# Altium PCB PCB1.PcbDoc (part 1 of 2)
Units mm, origin at the board's own origin, x right, y up, seen from the top; angles counter-clockwise.
Board outline 300 x 52 mm, 2 copper layers (Top Layer, Bottom Layer); 9 components, 43 nets, 99 pads, 36 vias.
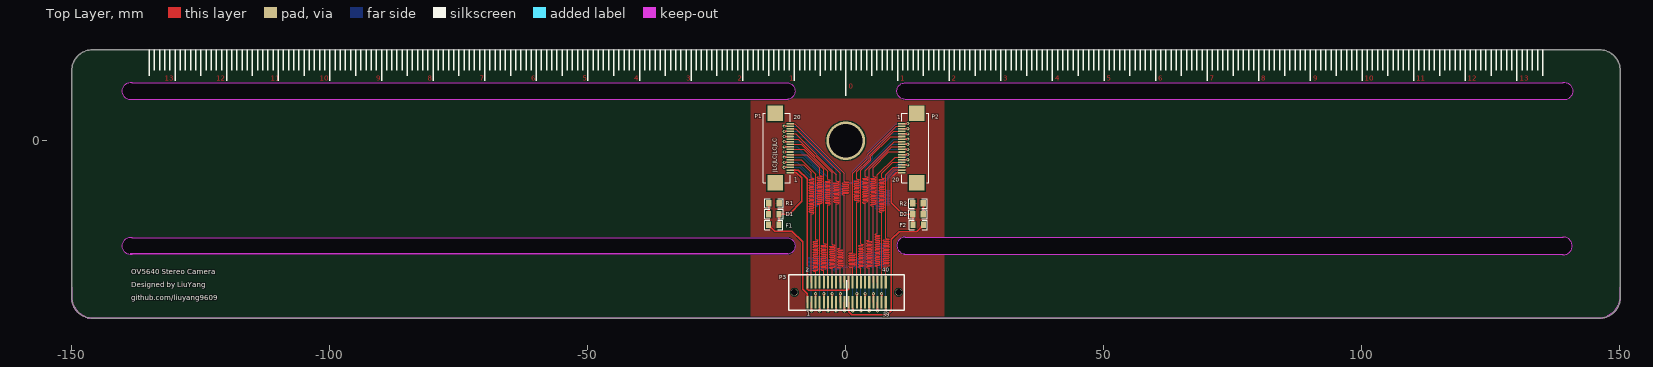
[diagram p0: Top Layer view]
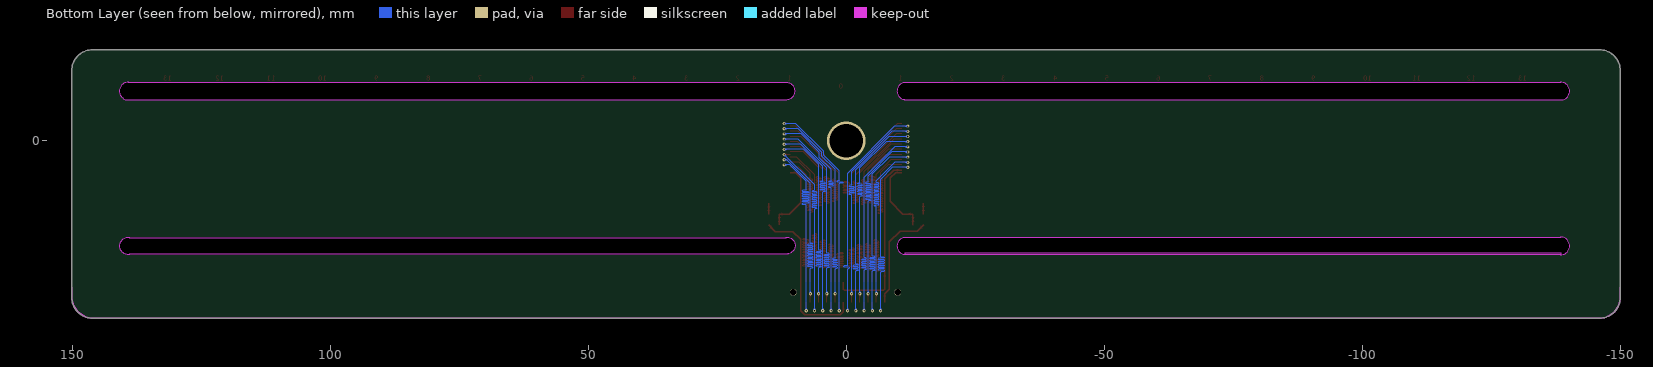
[diagram p1: Bottom Layer view, seen from below]
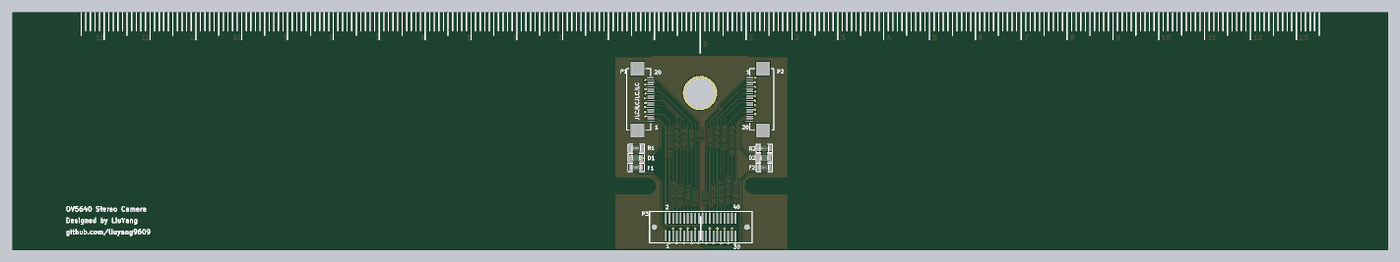
[diagram p3: 3D render of the assembled board from above, using the file's embedded part models]

## Layer stack, top to bottom
Top Solder: solder mask 0.0102, Solder Resist, Dk 3.5
Top Layer: signal copper 0.0356
Dielectric 1: dielectric 0.32, FR-4, Dk 4.8
Bottom Layer: signal copper 0.0356
Bottom Solder: solder mask 0.0102, Solder Resist, Dk 3.5

## Board outline
-149.965,-30.382 -149.965,13.618 cw(c-145.965,13.618) -145.965,17.618 146.035,17.618 cw(c146.035,13.618) 150.035,13.618 150.035,-30.382 cw(c146.035,-30.382) 146.035,-34.382 -145.965,-34.382 cw(c-145.965,-30.382)
cut-out: -138.465,-22.09 cw(c-138.465,-20.382) -138.465,-18.673 cw(c-138.465,-18.801) -138.346,-18.754 -11.465,-18.754 cw(c-11.465,-20.382) -9.837,-20.382 cw(c-11.465,-20.382) -11.465,-22.009 -138.346,-22.009 cw(c-138.465,-21.963)
cut-out: -138.465,-22.009 cw(c-138.465,-21.882) -138.465,-21.754 -11.465,-21.754 cw(c-11.465,-21.882) -11.337,-21.882 cw(c-11.465,-21.882) -11.465,-22.009
cut-out: -138.465,-22.009 cw(c-138.465,-21.882) -138.465,-21.754 -11.465,-21.754 cw(c-11.465,-21.882) -11.337,-21.882 cw(c-11.465,-21.882) -11.465,-22.009
cut-out: -138.465,7.91 cw(c-138.465,9.618) -138.465,11.327 cw(c-138.465,11.199) -138.346,11.246 -11.165,11.246 cw(c-11.165,11.118) -11.063,11.195 cw(c-11.465,9.618) -9.837,9.618 cw(c-11.465,9.618) -11.192,8.014 cw(c-11.265,8.118) -11.265,7.991 -138.346,7.991 cw(c-138.465,8.037)
cut-out: 11.308,-21.893 ccw(c11.435,-21.882) 11.435,-22.009 138.917,-22.009 ccw(c139.035,-21.963) 139.035,-22.09 ccw(c139.035,-20.382) 140.744,-20.382 ccw(c139.035,-20.382) 139.035,-18.673 ccw(c139.035,-18.801) 138.917,-18.754 11.66,-18.754 ccw(c11.535,-18.782) 11.535,-18.654 ccw(c11.535,-20.282)
cut-out: 11.535,7.991 cw(c11.535,9.618) 11.535,11.246 138.998,11.246 cw(c139.116,11.199) 139.116,11.327 cw(c139.116,9.618) 140.825,9.618 cw(c139.116,9.618) 139.024,7.912 cw(c139.031,8.039) 138.913,7.991

## Design rules (kind name [scope] priority, off if disabled: settings)
Clearance [All] p1: gap=0.2
Length [InNetClass('1')] p1: maxlimit=48 minlimit=47
PolygonConnect [All] p1: connectstyle=Relief reliefconductorwidth=0.254 reliefentries=4 polygonreliefangle="90 Angle" airgapwidth=0.254
RoutingVias [All] p1: holewidth=0.3 width=0.6 viastyle="Through Hole" minholewidth=0.3 minwidth=0.6 maxholewidth=50 maxwidth=8
SolderMaskExpansion [All] p1: expansion=0.102
Width [All] p1: maxlimit=1.27 minlimit=0.127 preferedwidth=0.127
30 further rules are at their usual default settings.

## Classes and differential pairs
component class Sheet1: D1 D2 F1 F2 P1 P3 R1 R2
net class 1: D10 D11 D12 D13 D14 D15 D16 D17 D18 D19 D20 D21 D22 D23 D24 D25 D26 D27 E10 E11 E12 E13 E14 E15 E16 E17 E18 E19 E20 E21 E22 E23 E24 E25 E26 E27

## Components (designator, comment, footprint, x,y, rotation, side; value= is the part's Value field where it differs from the comment)
D1 "LED0" LED0805绿 -13.945,-14.199 r180 top
D2 "LED0" LED0805绿 13.995,-14.224 r0 top
F1 "500mA" R0805 -13.97,-16.307 r0 top
F2 "500mA" R0805 14.021,-16.307 r180 top
P1 "Header 22" FPC20Pin -10.77,-6.172 r180 top locked
P2 "Header 22" FPC20Pin 10.846,3.327 r0 top locked
P3 "Header 20X2" BTB0.8con40Pin -7.464,-31.295 r90 top locked
R1 "Res2" R0805 -13.919,-12.09 r0 top
R2 "Res2" R0805 13.995,-12.141 r0 top

## Footprints (in the part's own frame and the unit in brackets; to place one, negate y for a bottom-side part, rotate by r counter-clockwise, add the part's x,y. Pads: shape width x height; smd on the part's side, far side on the other; paste and mask are expansions set on the pad)
BTB0.8con40Pin [mm]
  rect 2.44x0.4 smd: 1(0,0) 2(3.86,0) 3(0,-0.8) 4(3.86,-0.8) 5(0,-1.6) 6(3.86,-1.6) 7(0,-2.4) 8(3.86,-2.4) 9(0,-3.2) 10(3.86,-3.2) 11(0,-4) 12(3.86,-4) 13(0,-4.8) 14(3.86,-4.8) 15(0,-5.6) 16(3.86,-5.6) 17(0,-6.4) 18(3.86,-6.4) 19(0,-7.2) 20(3.86,-7.2) 21(0,-8) 22(3.86,-8) 23(0,-8.8) 24(3.86,-8.8) 25(0,-9.6) 26(3.86,-9.6) 27(0,-10.4) 28(3.86,-10.4) 29(0,-11.2) 30(3.86,-11.2) 31(0,-12) 32(3.86,-12) 33(0,-12.8) 34(3.86,-12.8) 35(0,-13.6) 36(3.86,-13.6) 37(0,-14.4) 38(3.86,-14.4) 39(0,-15.2) 40(3.86,-15.2)
  round 1.3 hole 1.3: 41(1.93,-17.7) 42(1.93,2.5)
  silkscreen extent -1.52,-18.8 5.33,3.56
FPC20Pin [mm]
  rect 1.5x0.3 smd: 1(0,0)
  oval 1.5x0.3 smd: 2(0,-0.5) 3(0,-1) 4(0,-1.5) 5(0,-2) 6(0,-2.5) 7(0,-3) 8(0,-3.5) 9(0,-4) 10(0,-4.5) 11(0,-5) 12(0,-5.5) 13(0,-6) 14(0,-6.5) 15(0,-7) 16(0,-7.5) 17(0,-8) 18(0,-8.5) 19(0,-9) 20(0,-9.5)
  rect 3x3 smd: 21(2.9,2) 22(2.9,-11.5)
  silkscreen extent 0,-11.5 5.2,2
LED0805绿 [mil]
  rect 40x50 smd: 1(-40,0) 2(40,0)
  silkscreen extent -70,-35 70,35, body extent -40,-25 40,24, height 43
R0805 [mil]
  rect 40x50 smd: 1(-40,0) 2(40,0)
  silkscreen extent -70,-35 70,35, body extent -39,-25 39,25, height 22

## Part data
D1 D2: "Typical INFRARED GaAs LED"
F1 F2: library part "Fuse 1", "Fuse"
P1 P2: "Header, 22-Pin"
P3: "Header, 20-Pin, Dual row"
R1 R2: "Resistor"

## Free pads (board coordinates)
  round 7.5 hole 6.5: 0(0,0)

## Via types
v1: diameter 0.6, hole 0.3, Top Layer to Bottom Layer, 36 vias

## Nets (pads, with @x,y where several pads share a name; then routed paths per layer and width w, separated by ;. In a path a pad name is that pad's centre, name@x,y a point inside that pad or via, vN(x,y) a via of type N, cw(c..) or ccw(c..) an arc to the next point about the centre after c; other vN are vias at no path point)
D10: P1.3 P3.3 | length 46.8
  Top Layer w0.127: v1(-11.963,-5.131) -10.811,-5.131 P1.3@-10.77,-5.172 ; v1(-6.664,-32.942) P3.3@-6.664,-31.295
  Bottom Layer w0.127: v1(-11.963,-5.131) -11.963,-5.156 -8.921,-5.156 -6.664,-7.413 -6.664,-20.523 -6.664,-22.454 -6.765,-22.555 -7.328,-22.555 -7.429,-22.657 -7.429,-22.708 -7.328,-22.809 -6.664,-22.809 -6.327,-22.809 -6.225,-22.911 -6.225,-22.962 -6.327,-23.063 -6.664,-23.063 -7.328,-23.063 -7.429,-23.165 -7.429,-23.216 -7.328,-23.317 -6.664,-23.317 -6.327,-23.317 -6.225,-23.419 -6.225,-23.47 -6.327,-23.571 -6.664,-23.571 -7.328,-23.571 -7.429,-23.673 -7.429,-23.724 -7.328,-23.825 -6.664,-23.825 -6.327,-23.825 -6.225,-23.927 -6.225,-23.978 -6.327,-24.079 -6.664,-24.079 -7.328,-24.079 -7.429,-24.181 -7.429,-24.232 -7.328,-24.333 -6.664,-24.333 -6.327,-24.333 -6.225,-24.435 -6.225,-24.486 -6.327,-24.587 -6.664,-24.587 -7.328,-24.587 -7.429,-24.689 -7.429,-24.74 -7.328,-24.841 -6.664,-24.841 -6.327,-24.841 -6.225,-24.943 -6.225,-24.994 -6.327,-25.095 -6.664,-25.095 -7.328,-25.095 -7.429,-25.197 -7.429,-25.248 -7.328,-25.349 -6.765,-25.349 -6.664,-25.451 -6.664,-25.476 v1(-6.664,-32.942)
D11: P1.4 P3.4 | length 47.4
  Top Layer w0.127: P1.4@-10.77,-4.672 -8.109,-4.672 -6.664,-6.118 -6.664,-7.112 -6.664,-7.163 -6.588,-7.239 -6.267,-7.239 -6.191,-7.315 -6.191,-7.417 -6.267,-7.493 -6.664,-7.493 -6.997,-7.493 -7.073,-7.569 -7.073,-7.671 -6.997,-7.747 -6.664,-7.747 -6.267,-7.747 -6.191,-7.823 -6.191,-7.925 -6.267,-8.001 -6.664,-8.001 -6.997,-8.001 -7.073,-8.077 -7.073,-8.179 -6.997,-8.255 -6.664,-8.255 -6.267,-8.255 -6.191,-8.331 -6.191,-8.433 -6.267,-8.509 -6.664,-8.509 -6.997,-8.509 -7.073,-8.585 -7.073,-8.687 -6.997,-8.763 -6.664,-8.763 -6.267,-8.763 -6.191,-8.839 -6.191,-8.941 -6.267,-9.017 -6.664,-9.017 -6.997,-9.017 -7.073,-9.093 -7.073,-9.195 -6.997,-9.271 -6.664,-9.271 -6.267,-9.271 -6.191,-9.347 -6.191,-9.449 -6.267,-9.525 -6.664,-9.525 -6.997,-9.525 -7.073,-9.601 -7.073,-9.703 -6.997,-9.779 -6.664,-9.779 -6.267,-9.779 -6.191,-9.855 -6.191,-9.957 -6.267,-10.033 -6.664,-10.033 -6.997,-10.033 -7.073,-10.109 -7.073,-10.211 -6.997,-10.287 -6.664,-10.287 -6.267,-10.287 -6.191,-10.363 -6.191,-10.465 -6.267,-10.541 -6.664,-10.541 -6.997,-10.541 -7.073,-10.617 -7.073,-10.719 -6.997,-10.795 -6.664,-10.795 -6.267,-10.795 -6.191,-10.871 -6.191,-10.973 -6.267,-11.049 -6.664,-11.049 -6.997,-11.049 -7.073,-11.125 -7.073,-11.227 -6.997,-11.303 -6.664,-11.303 -6.267,-11.303 -6.191,-11.379 -6.191,-11.481 -6.267,-11.557 -6.664,-11.557 -6.997,-11.557 -7.073,-11.633 -7.073,-11.735 -6.997,-11.811 -6.664,-11.811 -6.267,-11.811 -6.191,-11.887 -6.191,-11.989 -6.267,-12.065 -6.664,-12.065 -6.997,-12.065 -7.073,-12.141 -7.073,-12.243 -6.997,-12.319 -6.664,-12.319 -6.267,-12.319 -6.191,-12.395 -6.191,-12.497 -6.267,-12.573 -6.664,-12.573 -6.997,-12.573 -7.073,-12.649 -7.073,-12.751 -6.997,-12.827 -6.664,-12.827 -6.267,-12.827 -6.191,-12.903 -6.191,-13.005 -6.267,-13.081 -6.664,-13.081 -6.997,-13.081 -7.073,-13.157 -7.073,-13.259 -6.997,-13.335 -6.664,-13.335 -6.267,-13.335 -6.191,-13.411 -6.191,-13.513 -6.267,-13.589 -6.664,-13.589 -6.997,-13.589 -7.073,-13.665 -7.073,-13.767 -6.997,-13.843 -6.664,-13.843 -6.267,-13.843 -6.191,-13.919 -6.191,-14.021 -6.267,-14.097 -6.588,-14.097 -6.664,-14.173 -6.664,-14.961 P3.4@-6.664,-27.435
D12: P1.5 P3.5 | length 46.8
  Top Layer w0.127: v1(-11.947,-4.172) P1.5@-10.77,-4.172 ; P3.5@-5.864,-31.295 v1(-5.864,-29.648)
  Bottom Layer w0.127: v1(-11.947,-4.172) -9.442,-4.172 -5.864,-7.751 -5.864,-7.878 -5.864,-8.03 -5.965,-8.132 -6.228,-8.132 -6.329,-8.233 -6.329,-8.284 -6.228,-8.386 -5.864,-8.386 -5.5,-8.386 -5.398,-8.487 -5.398,-8.538 -5.5,-8.64 -5.864,-8.64 -6.228,-8.64 -6.329,-8.741 -6.329,-8.792 -6.228,-8.894 -5.864,-8.894 -5.5,-8.894 -5.398,-8.995 -5.398,-9.046 -5.5,-9.148 -5.864,-9.148 -6.228,-9.148 -6.329,-9.249 -6.329,-9.3 -6.228,-9.402 -5.864,-9.402 -5.5,-9.402 -5.398,-9.503 -5.398,-9.554 -5.5,-9.656 -5.864,-9.656 -6.228,-9.656 -6.329,-9.757 -6.329,-9.808 -6.228,-9.91 -5.864,-9.91 -5.5,-9.91 -5.398,-10.011 -5.398,-10.062 -5.5,-10.164 -5.864,-10.164 -6.228,-10.164 -6.329,-10.265 -6.329,-10.316 -6.228,-10.418 -5.864,-10.418 -5.5,-10.418 -5.398,-10.519 -5.398,-10.57 -5.5,-10.672 -5.864,-10.672 -6.228,-10.672 -6.329,-10.773 -6.329,-10.824 -6.228,-10.926 -5.864,-10.926 -5.5,-10.926 -5.398,-11.027 -5.398,-11.078 -5.5,-11.18 -5.864,-11.18 -6.228,-11.18 -6.329,-11.281 -6.329,-11.332 -6.228,-11.434 -5.864,-11.434 -5.5,-11.434 -5.398,-11.535 -5.398,-11.586 -5.5,-11.688 -5.864,-11.688 -6.228,-11.688 -6.329,-11.789 -6.329,-11.84 -6.228,-11.942 -5.864,-11.942 -5.5,-11.942 -5.398,-12.043 -5.398,-12.094 -5.5,-12.196 -5.864,-12.196 -6.228,-12.196 -6.329,-12.297 -6.329,-12.348 -6.228,-12.45 -5.864,-12.45 -5.5,-12.45 -5.398,-12.551 -5.398,-12.602 -5.5,-12.704 -5.762,-12.704 -5.864,-12.805 -5.864,-14.249 v1(-5.864,-29.648)
D13: P1.6 P3.6 | length 47.5
  Top Layer w0.127: P1.6@-10.77,-3.672 -8.647,-3.672 -5.864,-6.455 -5.864,-18.085 -5.864,-19.126 -5.788,-19.202 -5.467,-19.202 -5.391,-19.279 -5.391,-19.38 -5.467,-19.456 -5.864,-19.456 -6.26,-19.456 -6.337,-19.533 -6.337,-19.634 -6.26,-19.71 -5.864,-19.71 -5.467,-19.71 -5.391,-19.787 -5.391,-19.888 -5.467,-19.964 -5.864,-19.964 -6.26,-19.964 -6.337,-20.041 -6.337,-20.142 -6.26,-20.218 -5.864,-20.218 -5.467,-20.218 -5.391,-20.295 -5.391,-20.396 -5.467,-20.472 -5.864,-20.472 -6.26,-20.472 -6.337,-20.549 -6.337,-20.65 -6.26,-20.726 -5.864,-20.726 -5.467,-20.726 -5.391,-20.803 -5.391,-20.904 -5.467,-20.98 -5.864,-20.98 -6.26,-20.98 -6.337,-21.057 -6.337,-21.158 -6.26,-21.234 -5.864,-21.234 -5.467,-21.234 -5.391,-21.311 -5.391,-21.412 -5.467,-21.488 -5.864,-21.488 -6.26,-21.488 -6.337,-21.565 -6.337,-21.666 -6.26,-21.742 -5.864,-21.742 -5.467,-21.742 -5.391,-21.819 -5.391,-21.92 -5.467,-21.996 -5.864,-21.996 -6.26,-21.996 -6.337,-22.073 -6.337,-22.174 -6.26,-22.25 -5.864,-22.25 -5.467,-22.25 -5.391,-22.327 -5.391,-22.428 -5.467,-22.504 -5.864,-22.504 -6.26,-22.504 -6.337,-22.581 -6.337,-22.682 -6.26,-22.758 -5.864,-22.758 -5.467,-22.758 -5.391,-22.835 -5.391,-22.936 -5.467,-23.012 -5.864,-23.012 -6.26,-23.012 -6.337,-23.089 -6.337,-23.19 -6.26,-23.266 -5.864,-23.266 -5.467,-23.266 -5.391,-23.343 -5.391,-23.444 -5.467,-23.52 -5.864,-23.52 -6.26,-23.52 -6.337,-23.597 -6.337,-23.698 -6.26,-23.774 -5.864,-23.774 -5.467,-23.774 -5.391,-23.851 -5.391,-23.952 -5.467,-24.028 -5.864,-24.028 -6.26,-24.028 -6.337,-24.105 -6.337,-24.206 -6.26,-24.282 -5.864,-24.282 -5.467,-24.282 -5.391,-24.359 -5.391,-24.46 -5.467,-24.536 -5.864,-24.536 -6.26,-24.536 -6.337,-24.613 -6.337,-24.714 -6.26,-24.79 -5.864,-24.79 -5.467,-24.79 -5.391,-24.867 -5.391,-24.968 -5.467,-25.044 -5.864,-25.044 -6.26,-25.044 -6.337,-25.121 -6.337,-25.222 -6.26,-25.298 -5.94,-25.298 -5.864,-25.375 -5.864,-25.425 P3.6@-5.864,-27.435
D14: P1.7 P3.7 | length 46.5
  Top Layer w0.127: v1(-11.947,-3.172) P1.7@-10.77,-3.172 ; v1(-5.064,-32.942) P3.7@-5.064,-31.295
  Bottom Layer w0.127: v1(-11.947,-3.172) -8.319,-3.172 -5.064,-6.427 -5.064,-20.828 -5.064,-22.276 -5.165,-22.377 -5.435,-22.377 -5.537,-22.479 -5.537,-22.53 -5.435,-22.631 -5.064,-22.631 -4.692,-22.631 -4.591,-22.733 -4.591,-22.784 -4.692,-22.885 -5.064,-22.885 -5.435,-22.885 -5.537,-22.987 -5.537,-23.038 -5.435,-23.139 -5.064,-23.139 -4.692,-23.139 -4.591,-23.241 -4.591,-23.292 -4.692,-23.393 -5.064,-23.393 -5.435,-23.393 -5.537,-23.495 -5.537,-23.546 -5.435,-23.647 -5.064,-23.647 -4.692,-23.647 -4.591,-23.749 -4.591,-23.8 -4.692,-23.901 -5.064,-23.901 -5.435,-23.901 -5.537,-24.003 -5.537,-24.054 -5.435,-24.155 -5.064,-24.155 -4.692,-24.155 -4.591,-24.257 -4.591,-24.308 -4.692,-24.409 -5.064,-24.409 -5.435,-24.409 -5.537,-24.511 -5.537,-24.562 -5.435,-24.663 -5.064,-24.663 -4.692,-24.663 -4.591,-24.765 -4.591,-24.816 -4.692,-24.917 -5.064,-24.917 -5.435,-24.917 -5.537,-25.019 -5.537,-25.07 -5.435,-25.171 -5.165,-25.171 -5.064,-25.273 -5.064,-25.298 v1(-5.064,-32.942)
D15: P1.8 P3.8 | length 47.5
  Top Layer w0.127: P1.8@-10.77,-2.672 -7.585,-2.672 -5.064,-5.193 -5.064,-6.629 -5.064,-6.68 -4.988,-6.756 -4.673,-6.756 -4.596,-6.833 -4.596,-6.934 -4.673,-7.01 -5.064,-7.01 -5.455,-7.01 -5.531,-7.087 -5.531,-7.188 -5.455,-7.264 -5.064,-7.264 -4.673,-7.264 -4.596,-7.341 -4.596,-7.442 -4.673,-7.518 -5.064,-7.518 -5.455,-7.518 -5.531,-7.595 -5.531,-7.696 -5.455,-7.772 -5.064,-7.772 -4.673,-7.772 -4.596,-7.849 -4.596,-7.95 -4.673,-8.026 -5.064,-8.026 -5.455,-8.026 -5.531,-8.103 -5.531,-8.204 -5.455,-8.28 -5.064,-8.28 -4.673,-8.28 -4.596,-8.357 -4.596,-8.458 -4.673,-8.534 -5.064,-8.534 -5.455,-8.534 -5.531,-8.611 -5.531,-8.712 -5.455,-8.788 -5.064,-8.788 -4.673,-8.788 -4.596,-8.865 -4.596,-8.966 -4.673,-9.042 -5.064,-9.042 -5.455,-9.042 -5.531,-9.119 -5.531,-9.22 -5.455,-9.296 -5.064,-9.296 -4.673,-9.296 -4.596,-9.373 -4.596,-9.474 -4.673,-9.55 -5.064,-9.55 -5.455,-9.55 -5.531,-9.627 -5.531,-9.728 -5.455,-9.804 -5.064,-9.804 -4.673,-9.804 -4.596,-9.881 -4.596,-9.982 -4.673,-10.058 -5.064,-10.058 -5.455,-10.058 -5.531,-10.135 -5.531,-10.236 -5.455,-10.312 -5.064,-10.312 -4.673,-10.312 -4.596,-10.389 -4.596,-10.49 -4.673,-10.566 -5.064,-10.566 -5.455,-10.566 -5.531,-10.643 -5.531,-10.744 -5.455,-10.82 -5.064,-10.82 -4.673,-10.82 -4.596,-10.897 -4.596,-10.998 -4.673,-11.074 -5.064,-11.074 -5.455,-11.074 -5.531,-11.151 -5.531,-11.252 -5.455,-11.328 -5.064,-11.328 -4.673,-11.328 -4.596,-11.405 -4.596,-11.506 -4.673,-11.582 -5.064,-11.582 -5.455,-11.582 -5.531,-11.659 -5.531,-11.76 -5.455,-11.836 -5.064,-11.836 -4.673,-11.836 -4.596,-11.913 -4.596,-12.014 -4.673,-12.09 -5.064,-12.09 -5.455,-12.09 -5.531,-12.167 -5.531,-12.268 -5.455,-12.344 -5.14,-12.344 -5.064,-12.421 -5.064,-13.995 P3.8@-5.064,-27.435
D16: P1.9 P3.9 | length 46.8
  Top Layer w0.127: v1(-11.947,-2.172) P1.9@-10.77,-2.172 ; P3.9@-4.264,-31.295 v1(-4.264,-29.648)
  Bottom Layer w0.127: v1(-11.947,-2.172) -8.857,-2.172 -4.264,-6.765 -4.264,-7.95 -4.264,-7.976 -4.162,-8.077 -3.892,-8.077 -3.791,-8.179 -3.791,-8.23 -3.892,-8.331 -4.264,-8.331 -4.635,-8.331 -4.737,-8.433 -4.737,-8.484 -4.635,-8.585 -4.264,-8.585 -3.892,-8.585 -3.791,-8.687 -3.791,-8.738 -3.892,-8.839 -4.264,-8.839 -4.635,-8.839 -4.737,-8.941 -4.737,-8.992 -4.635,-9.093 -4.264,-9.093 -3.892,-9.093 -3.791,-9.195 -3.791,-9.246 -3.892,-9.347 -4.264,-9.347 -4.635,-9.347 -4.737,-9.449 -4.737,-9.5 -4.635,-9.601 -4.264,-9.601 -3.892,-9.601 -3.791,-9.703 -3.791,-9.754 -3.892,-9.855 -4.264,-9.855 -4.635,-9.855 -4.737,-9.957 -4.737,-10.008 -4.635,-10.109 -4.264,-10.109 -3.892,-10.109 -3.791,-10.211 -3.791,-10.262 -3.892,-10.363 -4.264,-10.363 -4.635,-10.363 -4.737,-10.465 -4.737,-10.516 -4.635,-10.617 -4.264,-10.617 -3.892,-10.617 -3.791,-10.719 -3.791,-10.77 -3.892,-10.871 -4.264,-10.871 -4.635,-10.871 -4.737,-10.973 -4.737,-11.024 -4.635,-11.125 -4.264,-11.125 -3.892,-11.125 -3.791,-11.227 -3.791,-11.278 -3.892,-11.379 -4.264,-11.379 -4.635,-11.379 -4.737,-11.481 -4.737,-11.532 -4.635,-11.633 -4.365,-11.633 -4.264,-11.735 -4.264,-12.675 v1(-4.264,-29.648)
D17: P1.10 P3.10 | length 47.1
  Top Layer w0.127: P1.10@-10.77,-1.672 -8.123,-1.672 -4.264,-5.531 -4.264,-17.729 -4.264,-19.888 -4.188,-19.964 -3.867,-19.964 -3.791,-20.041 -3.791,-20.142 -3.867,-20.218 -4.264,-20.218 -4.661,-20.218 -4.737,-20.295 -4.737,-20.396 -4.661,-20.472 -4.264,-20.472 -3.867,-20.472 -3.791,-20.549 -3.791,-20.65 -3.867,-20.726 -4.264,-20.726 -4.661,-20.726 -4.737,-20.803 -4.737,-20.904 -4.661,-20.98 -4.264,-20.98 -3.867,-20.98 -3.791,-21.057 -3.791,-21.158 -3.867,-21.234 -4.264,-21.234 -4.661,-21.234 -4.737,-21.311 -4.737,-21.412 -4.661,-21.488 -4.264,-21.488 -3.867,-21.488 -3.791,-21.565 -3.791,-21.666 -3.867,-21.742 -4.264,-21.742 -4.661,-21.742 -4.737,-21.819 -4.737,-21.92 -4.661,-21.996 -4.264,-21.996 -3.867,-21.996 -3.791,-22.073 -3.791,-22.174 -3.867,-22.25 -4.264,-22.25 -4.661,-22.25 -4.737,-22.327 -4.737,-22.428 -4.661,-22.504 -4.264,-22.504 -3.867,-22.504 -3.791,-22.581 -3.791,-22.682 -3.867,-22.758 -4.264,-22.758 -4.661,-22.758 -4.737,-22.835 -4.737,-22.936 -4.661,-23.012 -4.264,-23.012 -3.867,-23.012 -3.791,-23.089 -3.791,-23.19 -3.867,-23.266 -4.264,-23.266 -4.661,-23.266 -4.737,-23.343 -4.737,-23.444 -4.661,-23.52 -4.264,-23.52 -3.867,-23.52 -3.791,-23.597 -3.791,-23.698 -3.867,-23.774 -4.264,-23.774 -4.661,-23.774 -4.737,-23.851 -4.737,-23.952 -4.661,-24.028 -4.264,-24.028 -3.867,-24.028 -3.791,-24.105 -3.791,-24.206 -3.867,-24.282 -4.264,-24.282 -4.661,-24.282 -4.737,-24.359 -4.737,-24.46 -4.661,-24.536 -4.264,-24.536 -3.867,-24.536 -3.791,-24.613 -3.791,-24.714 -3.867,-24.79 -4.264,-24.79 -4.661,-24.79 -4.737,-24.867 -4.737,-24.968 -4.661,-25.044 -4.34,-25.044 -4.264,-25.121 -4.264,-25.171 P3.10@-4.264,-27.435
D18: P1.11 P3.11 | length 46.8
  Top Layer w0.127: v1(-11.947,-1.172) P1.11@-10.77,-1.172 ; v1(-3.464,-32.942) P3.11@-3.464,-31.295
  Bottom Layer w0.127: v1(-11.947,-1.172) -9.394,-1.172 -3.464,-7.103 -3.464,-19.837 -3.464,-22.581 -3.565,-22.682 -3.828,-22.682 -3.929,-22.784 -3.929,-22.835 -3.828,-22.936 -3.464,-22.936 -3.1,-22.936 -2.998,-23.038 -2.998,-23.089 -3.1,-23.19 -3.464,-23.19 -3.828,-23.19 -3.929,-23.292 -3.929,-23.343 -3.828,-23.444 -3.464,-23.444 -3.1,-23.444 -2.998,-23.546 -2.998,-23.597 -3.1,-23.698 -3.464,-23.698 -3.828,-23.698 -3.929,-23.8 -3.929,-23.851 -3.828,-23.952 -3.464,-23.952 -3.1,-23.952 -2.998,-24.054 -2.998,-24.105 -3.1,-24.206 -3.464,-24.206 -3.828,-24.206 -3.929,-24.308 -3.929,-24.359 -3.828,-24.46 -3.464,-24.46 -3.1,-24.46 -2.998,-24.562 -2.998,-24.613 -3.1,-24.714 -3.464,-24.714 -3.828,-24.714 -3.929,-24.816 -3.929,-24.867 -3.828,-24.968 -3.565,-24.968 -3.464,-25.07 -3.464,-25.095 v1(-3.464,-32.942)
D19: P1.12 P3.12 | length 47.2
  Top Layer w0.127: P1.12@-10.77,-0.672 -8.66,-0.672 -3.464,-5.868 -3.464,-7.442 -3.464,-7.493 -3.388,-7.569 -3.067,-7.569 -2.991,-7.645 -2.991,-7.747 -3.067,-7.823 -3.464,-7.823 -3.861,-7.823 -3.937,-7.899 -3.937,-8.001 -3.861,-8.077 -3.464,-8.077 -3.067,-8.077 -2.991,-8.153 -2.991,-8.255 -3.067,-8.331 -3.464,-8.331 -3.861,-8.331 -3.937,-8.407 -3.937,-8.509 -3.861,-8.585 -3.464,-8.585 -3.067,-8.585 -2.991,-8.661 -2.991,-8.763 -3.067,-8.839 -3.464,-8.839 -3.861,-8.839 -3.937,-8.915 -3.937,-9.017 -3.861,-9.093 -3.464,-9.093 -3.067,-9.093 -2.991,-9.169 -2.991,-9.271 -3.067,-9.347 -3.464,-9.347 -3.861,-9.347 -3.937,-9.423 -3.937,-9.525 -3.861,-9.601 -3.464,-9.601 -3.067,-9.601 -2.991,-9.677 -2.991,-9.779 -3.067,-9.855 -3.464,-9.855 -3.861,-9.855 -3.937,-9.931 -3.937,-10.033 -3.861,-10.109 -3.464,-10.109 -3.067,-10.109 -2.991,-10.185 -2.991,-10.287 -3.067,-10.363 -3.464,-10.363 -3.861,-10.363 -3.937,-10.439 -3.937,-10.541 -3.861,-10.617 -3.464,-10.617 -3.067,-10.617 -2.991,-10.693 -2.991,-10.795 -3.067,-10.871 -3.464,-10.871 -3.861,-10.871 -3.937,-10.947 -3.937,-11.049 -3.861,-11.125 -3.464,-11.125 -3.067,-11.125 -2.991,-11.201 -2.991,-11.303 -3.067,-11.379 -3.464,-11.379 -3.861,-11.379 -3.937,-11.455 -3.937,-11.557 -3.861,-11.633 -3.464,-11.633 -3.067,-11.633 -2.991,-11.709 -2.991,-11.811 -3.067,-11.887 -3.464,-11.887 -3.861,-11.887 -3.937,-11.963 -3.937,-12.065 -3.861,-12.141 -3.464,-12.141 -3.067,-12.141 -2.991,-12.217 -2.991,-12.319 -3.067,-12.395 -3.388,-12.395 -3.464,-12.471 -3.464,-13.157 P3.12@-3.464,-27.435
D20: P1.13 P3.13 | length 46.8
  Top Layer w0.127: v1(-11.947,-0.172) P1.13@-10.77,-0.172 ; P3.13@-2.664,-31.295 v1(-2.664,-29.648)
  Bottom Layer w0.127: v1(-11.947,-0.172) -7.727,-0.172 -2.664,-5.236 -2.664,-8.077 -2.664,-8.103 -2.562,-8.204 -2.292,-8.204 -2.191,-8.306 -2.191,-8.357 -2.292,-8.458 -2.664,-8.458 -3.035,-8.458 -3.137,-8.56 -3.137,-8.611 -3.035,-8.712 -2.664,-8.712 -2.292,-8.712 -2.191,-8.814 -2.191,-8.865 -2.292,-8.966 -2.664,-8.966 -3.035,-8.966 -3.137,-9.068 -3.137,-9.119 -3.035,-9.22 -2.664,-9.22 -2.292,-9.22 -2.191,-9.322 -2.191,-9.373 -2.292,-9.474 -2.664,-9.474 -3.035,-9.474 -3.137,-9.576 -3.137,-9.627 -3.035,-9.728 -2.664,-9.728 -2.292,-9.728 -2.191,-9.83 -2.191,-9.881 -2.292,-9.982 -2.664,-9.982 -3.035,-9.982 -3.137,-10.084 -3.137,-10.135 -3.035,-10.236 -2.664,-10.236 -2.292,-10.236 -2.191,-10.338 -2.191,-10.389 -2.292,-10.49 -2.664,-10.49 -3.035,-10.49 -3.137,-10.592 -3.137,-10.643 -3.035,-10.744 -2.765,-10.744 -2.664,-10.846 -2.664,-12.065 v1(-2.664,-29.648)
D21: P1.14 P3.14 | length 47.4
  Top Layer w0.127: P1.14@-10.77,0.328 -9.198,0.328 -2.664,-6.206 -2.664,-17.221 -2.664,-20.066 -2.588,-20.142 -2.267,-20.142 -2.191,-20.218 -2.191,-20.32 -2.267,-20.396 -2.664,-20.396 -3.061,-20.396 -3.137,-20.472 -3.137,-20.574 -3.061,-20.65 -2.664,-20.65 -2.267,-20.65 -2.191,-20.726 -2.191,-20.828 -2.267,-20.904 -2.664,-20.904 -3.061,-20.904 -3.137,-20.98 -3.137,-21.082 -3.061,-21.158 -2.664,-21.158 -2.267,-21.158 -2.191,-21.234 -2.191,-21.336 -2.267,-21.412 -2.664,-21.412 -3.061,-21.412 -3.137,-21.488 -3.137,-21.59 -3.061,-21.666 -2.664,-21.666 -2.267,-21.666 -2.191,-21.742 -2.191,-21.844 -2.267,-21.92 -2.664,-21.92 -3.061,-21.92 -3.137,-21.996 -3.137,-22.098 -3.061,-22.174 -2.664,-22.174 -2.267,-22.174 -2.191,-22.25 -2.191,-22.352 -2.267,-22.428 -2.664,-22.428 -3.061,-22.428 -3.137,-22.504 -3.137,-22.606 -3.061,-22.682 -2.664,-22.682 -2.267,-22.682 -2.191,-22.758 -2.191,-22.86 -2.267,-22.936 -2.664,-22.936 -3.061,-22.936 -3.137,-23.012 -3.137,-23.114 -3.061,-23.19 -2.664,-23.19 -2.267,-23.19 -2.191,-23.266 -2.191,-23.368 -2.267,-23.444 -2.664,-23.444 -3.061,-23.444 -3.137,-23.52 -3.137,-23.622 -3.061,-23.698 -2.664,-23.698 -2.267,-23.698 -2.191,-23.774 -2.191,-23.876 -2.267,-23.952 -2.664,-23.952 -3.061,-23.952 -3.137,-24.028 -3.137,-24.13 -3.061,-24.206 -2.664,-24.206 -2.267,-24.206 -2.191,-24.282 -2.191,-24.384 -2.267,-24.46 -2.664,-24.46 -3.061,-24.46 -3.137,-24.536 -3.137,-24.638 -3.061,-24.714 -2.74,-24.714 -2.664,-24.79 -2.664,-24.841 P3.14@-2.664,-27.435
D22: P1.15 P3.15 | length 46.8
  Top Layer w0.127: v1(-11.947,0.828) P1.15@-10.77,0.828 ; v1(-1.864,-32.942) P3.15@-1.864,-31.295
  Bottom Layer w0.127: v1(-11.947,0.828) -8.265,0.828 -1.864,-5.573 -1.864,-21.031 -1.864,-23.8 -1.965,-23.901 -2.22,-23.901 -2.321,-24.003 -2.321,-24.054 -2.22,-24.155 -1.864,-24.155 -1.508,-24.155 -1.406,-24.257 -1.406,-24.308 -1.508,-24.409 -1.864,-24.409 -2.22,-24.409 -2.321,-24.511 -2.321,-24.562 -2.22,-24.663 -1.864,-24.663 -1.508,-24.663 -1.406,-24.765 -1.406,-24.816 -1.508,-24.917 -1.864,-24.917 -2.22,-24.917 -2.321,-25.019 -2.321,-25.07 -2.22,-25.171 -1.965,-25.171 -1.864,-25.273 -1.864,-25.298 v1(-1.864,-32.942)
D23: P1.16 P3.16 | length 47.5
  Top Layer w0.127: P1.16@-10.77,1.328 -9.735,1.328 -1.864,-6.544 -1.864,-7.722 -1.864,-7.772 -1.788,-7.849 -1.468,-7.849 -1.392,-7.925 -1.392,-8.026 -1.468,-8.103 -1.864,-8.103 -2.26,-8.103 -2.336,-8.179 -2.336,-8.28 -2.26,-8.357 -1.864,-8.357 -1.468,-8.357 -1.392,-8.433 -1.392,-8.534 -1.468,-8.611 -1.864,-8.611 -2.26,-8.611 -2.336,-8.687 -2.336,-8.788 -2.26,-8.865 -1.864,-8.865 -1.468,-8.865 -1.392,-8.941 -1.392,-9.042 -1.468,-9.119 -1.864,-9.119 -2.26,-9.119 -2.336,-9.195 -2.336,-9.296 -2.26,-9.373 -1.864,-9.373 -1.468,-9.373 -1.392,-9.449 -1.392,-9.55 -1.468,-9.627 -1.864,-9.627 -2.26,-9.627 -2.336,-9.703 -2.336,-9.804 -2.26,-9.881 -1.864,-9.881 -1.468,-9.881 -1.392,-9.957 -1.392,-10.058 -1.468,-10.135 -1.864,-10.135 -2.26,-10.135 -2.336,-10.211 -2.336,-10.312 -2.26,-10.389 -1.864,-10.389 -1.468,-10.389 -1.392,-10.465 -1.392,-10.566 -1.468,-10.643 -1.864,-10.643 -2.26,-10.643 -2.336,-10.719 -2.336,-10.82 -2.26,-10.897 -1.864,-10.897 -1.468,-10.897 -1.392,-10.973 -1.392,-11.074 -1.468,-11.151 -1.864,-11.151 -2.26,-11.151 -2.336,-11.227 -2.336,-11.328 -2.26,-11.405 -1.864,-11.405 -1.468,-11.405 -1.392,-11.481 -1.392,-11.582 -1.468,-11.659 -1.864,-11.659 -2.26,-11.659 -2.336,-11.735 -2.336,-11.836 -2.26,-11.913 -1.864,-11.913 -1.468,-11.913 -1.392,-11.989 -1.392,-12.09 -1.468,-12.167 -1.788,-12.167 -1.864,-12.243 -1.864,-12.649 P3.16@-1.864,-27.435
D24: P1.17 P3.17 | length 46.3
  Top Layer w0.127: v1(-11.947,1.828) P1.17@-10.77,1.828 ; P3.17@-1.064,-31.295 v1(-1.064,-29.648)
  Bottom Layer w0.127: v1(-11.947,1.828) -8.802,1.828 -1.064,-5.911 -1.064,-8.534 -1.064,-8.56 -0.962,-8.661 -0.692,-8.661 -0.591,-8.763 -0.591,-8.814 -0.692,-8.915 -1.064,-8.915 -1.435,-8.915 -1.537,-9.017 -1.537,-9.068 -1.435,-9.169 -1.064,-9.169 -0.692,-9.169 -0.591,-9.271 -0.591,-9.322 -0.692,-9.423 -1.064,-9.423 -1.435,-9.423 -1.537,-9.525 -1.537,-9.576 -1.435,-9.677 -1.064,-9.677 -0.692,-9.677 -0.591,-9.779 -0.591,-9.83 -0.692,-9.931 -1.064,-9.931 -1.435,-9.931 -1.537,-10.033 -1.537,-10.084 -1.435,-10.185 -1.064,-10.185 -0.692,-10.185 -0.591,-10.287 -0.591,-10.338 -0.692,-10.439 -0.962,-10.439 -1.064,-10.541 -1.064,-11.836 v1(-1.064,-29.648)
D25: P1.18 P3.18 | length 47.2
  Top Layer w0.127: P1.18@-10.77,2.328 -9.694,2.328 -1.064,-6.302 -1.064,-19.787 -1.064,-20.752 -1.14,-20.828 -1.461,-20.828 -1.537,-20.904 -1.537,-21.006 -1.461,-21.082 -1.064,-21.082 -0.667,-21.082 -0.591,-21.158 -0.591,-21.26 -0.667,-21.336 -1.064,-21.336 -1.461,-21.336 -1.537,-21.412 -1.537,-21.514 -1.461,-21.59 -1.064,-21.59 -0.667,-21.59 -0.591,-21.666 -0.591,-21.768 -0.667,-21.844 -1.064,-21.844 -1.461,-21.844 -1.537,-21.92 -1.537,-22.022 -1.461,-22.098 -1.064,-22.098 -0.667,-22.098 -0.591,-22.174 -0.591,-22.276 -0.667,-22.352 -1.064,-22.352 -1.461,-22.352 -1.537,-22.428 -1.537,-22.53 -1.461,-22.606 -1.064,-22.606 -0.667,-22.606 -0.591,-22.682 -0.591,-22.784 -0.667,-22.86 -1.064,-22.86 -1.461,-22.86 -1.537,-22.936 -1.537,-23.038 -1.461,-23.114 -1.064,-23.114 -0.667,-23.114 -0.591,-23.19 -0.591,-23.292 -0.667,-23.368 -1.064,-23.368 -1.461,-23.368 -1.537,-23.444 -1.537,-23.546 -1.461,-23.622 -1.064,-23.622 -0.667,-23.622 -0.591,-23.698 -0.591,-23.8 -0.667,-23.876 -1.064,-23.876 -1.461,-23.876 -1.537,-23.952 -1.537,-24.054 -1.461,-24.13 -1.064,-24.13 -0.667,-24.13 -0.591,-24.206 -0.591,-24.308 -0.667,-24.384 -1.064,-24.384 -1.461,-24.384 -1.537,-24.46 -1.537,-24.562 -1.461,-24.638 -1.14,-24.638 -1.064,-24.714 -1.064,-24.765 P3.18@-1.064,-27.435
D26: P1.19 P3.19 | length 46.8
  Top Layer w0.127: v1(-11.947,2.828) P1.19@-10.77,2.828 ; v1(-0.264,-32.942) P3.19@-0.264,-31.295
  Bottom Layer w0.127: v1(-11.947,2.828) -9.34,2.828 -0.264,-6.248 -0.264,-22.2 -0.264,-24.155 -0.162,-24.257 0.345,-24.257 0.446,-24.359 0.446,-24.409 0.345,-24.511 -0.264,-24.511 -0.545,-24.511 -0.647,-24.613 -0.647,-24.663 -0.545,-24.765 -0.365,-24.765 -0.264,-24.867 -0.264,-24.892 v1(-0.264,-32.942)
D27: P1.20 P3.20 | length 47
  Top Layer w0.127: P1.20@-10.77,3.328 -9.906,3.328 -0.264,-6.315 -0.264,-7.798 -0.264,-7.823 -0.162,-7.925 0.435,-7.925 0.536,-8.026 0.536,-8.077 0.435,-8.179 -0.264,-8.179 -0.635,-8.179 -0.737,-8.28 -0.737,-8.331 -0.635,-8.433 -0.264,-8.433 0.435,-8.433 0.536,-8.534 0.536,-8.585 0.435,-8.687 -0.264,-8.687 -0.635,-8.687 -0.737,-8.788 -0.737,-8.839 -0.635,-8.941 -0.264,-8.941 0.435,-8.941 0.536,-9.042 0.536,-9.093 0.435,-9.195 -0.264,-9.195 -0.635,-9.195 -0.737,-9.296 -0.737,-9.347 -0.635,-9.449 -0.264,-9.449 0.435,-9.449 0.536,-9.55 0.536,-9.601 0.435,-9.703 -0.264,-9.703 -0.635,-9.703 -0.737,-9.804 -0.737,-9.855 -0.635,-9.957 -0.264,-9.957 0.435,-9.957 0.536,-10.058 0.536,-10.109 0.435,-10.211 -0.264,-10.211 -0.635,-10.211 -0.737,-10.312 -0.737,-10.363 -0.635,-10.465 -0.365,-10.465 -0.264,-10.566 -0.264,-12.167 P3.20@-0.264,-27.435
E10: P2.1 P3.23 | length 46.8
  Top Layer w0.127: v1(1.336,-32.942) P3.23@1.336,-31.295 ; P2.1@10.846,3.327 v1(12.023,3.327)
  Bottom Layer w0.127: v1(1.336,-32.942) 1.336,-9.83 1.336,-8.357 1.235,-8.255 0.696,-8.255 0.595,-8.153 0.595,-8.103 0.696,-8.001 1.336,-8.001 1.649,-8.001 1.751,-7.899 1.751,-7.849 1.649,-7.747 1.438,-7.747 1.336,-7.645 1.336,-7.62 1.336,-5.827 4.394,-2.769 4.394,-2.057 9.779,3.327 v1(12.023,3.327)